# EAGLE board Pin-Zusammenfassung (EAGLE 9.6.2)
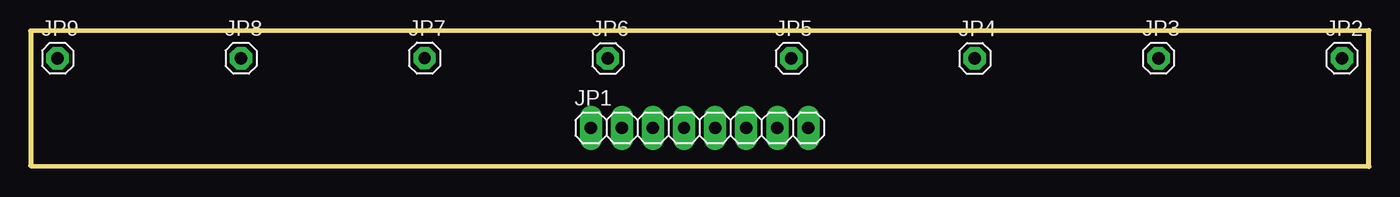
[diagram p0: board, top side]
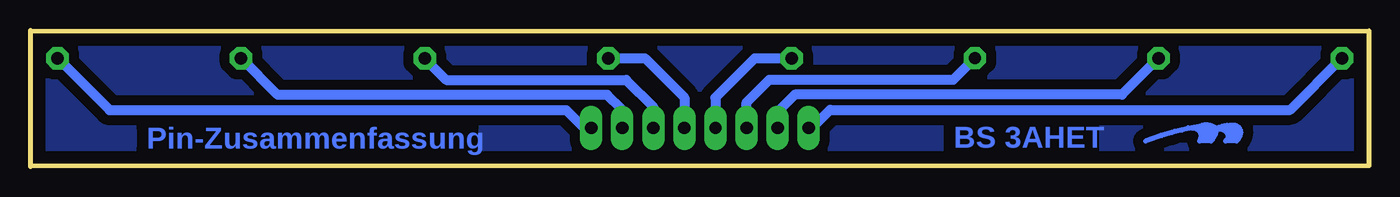
[diagram p1: board, bottom side, seen from below]

Size 109.43 x 11.13 mm. Coordinates in mm from the lower left corner, seen from the top.
Outline: 0,0.05 109.42,0 109.43,11.13 0,11.08 0,0.05
Copper layers (1*16): Top 0.035mm / dielectric 1.5mm / Bottom 0.035mm
Design rules "htl": minimum track width 16mil, minimum drill 24mil, track to track 16mil, track to pad 16mil, pad to pad 16mil, via to via 16mil, smd to smd 12mil, copper to edge 40mil, drill to drill 6mil, minimum pad ring 16mil, minimum via ring 16mil, stop-mask expansion 4mil, vias tented up to drill 0mil, thermal gap 20mil

## Footprints (pad centres in the part's own frame; a part is rotated, then mirrored left to right if it is on the bottom)
1X08 = drill 1.016 long: 1 -8.89,0; 2 -6.35,0; 3 -3.81,0; 4 -1.27,0; 5 1.27,0; 6 3.81,0; 7 6.35,0; 8 8.89,0
1X01 = drill 1.016 octagon: 1 0,0

## Placement (x,y rotation side)
JP1  [1X08]  54.7,3.15 0 top
JP2  [1X01]  107.22,8.86 0 top
JP3  [1X01]  92.22,8.86 0 top
JP4  [1X01]  77.2,8.84 0 top
JP5  [1X01]  62.2,8.85 0 top
JP6  [1X01]  47.21,8.84 0 top
JP7  [1X01]  32.22,8.87 0 top
JP8  [1X01]  17.21,8.86 0 top
JP9  [1X01]  2.21,8.86 0 top
U$1  [LOGOBOT_8]  14.6,1.97 0 top

## Library data of the parts
JP1-JP9 = pinhead
U$1 = HTL-Logo

## Nets
N$1: JP1.8 JP2.1
N$2: JP1.7 JP3.1
N$3: JP1.6 JP4.1
N$4: JP1.5 JP5.1
N$5: JP1.4 JP6.1
N$6: JP1.3 JP7.1
N$7: JP1.2 JP8.1
N$8: JP1.1 JP9.1

## Tracks (layer width: path | path; a pad name or v marks a point on that pad's centre or on a via)
GND
  pour Bottom (isolate 0.813): 0.01,11.05 109.37,11.05 109.37,0.1 0.01,0.1
N$1
  Bottom 0.813: JP1.8 64.17,3.15 65.63,4.61 102.97,4.61 JP2.1
N$2
  Bottom 0.508: JP1.7 61.1,3.2
  Bottom 0.813: 61.1,3.2 61.1,4.68 62.28,5.86 89.22,5.86 JP3.1
N$3
  Bottom 0.813: JP4.1 75.44,7.08 60.73,7.08 58.51,4.86 JP1.6
N$4
  Bottom 0.813: JP5.1 59.2,8.85 55.97,5.62 JP1.5
N$5
  Bottom 0.813: JP6.1 50.23,8.84 53.43,5.64 JP1.4
N$6
  Bottom 0.813: JP7.1 33.98,7.11 49.03,7.11 50.89,5.25 JP1.3
N$7
  Bottom 0.813: JP8.1 20.2,5.87 46.94,5.87 48.35,4.46 JP1.2
N$8
  Bottom 0.813: JP1.1 45.53,3.15 44.05,4.63 6.44,4.63 JP9.1

## Text on the board
Bottom: BS 3AHET | Pin-Zusammenfassung